# EAGLE board Versa64Cart_v1_2 (EAGLE 9.2.2)
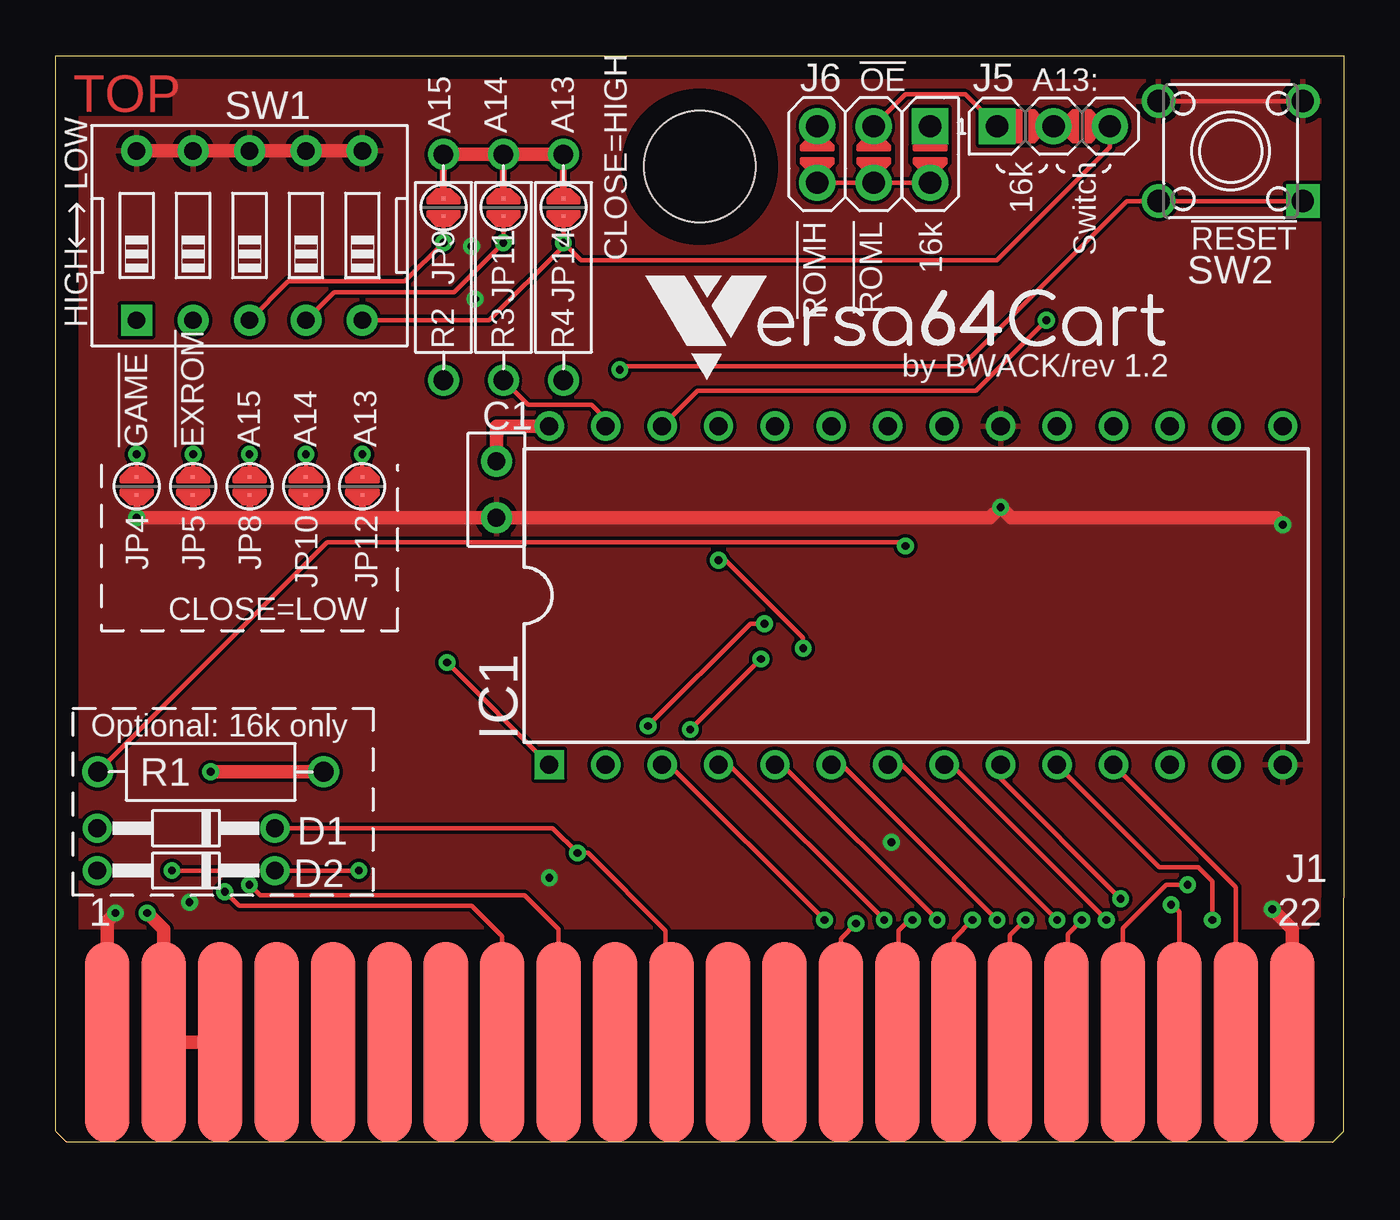
[diagram p0: board, top side]
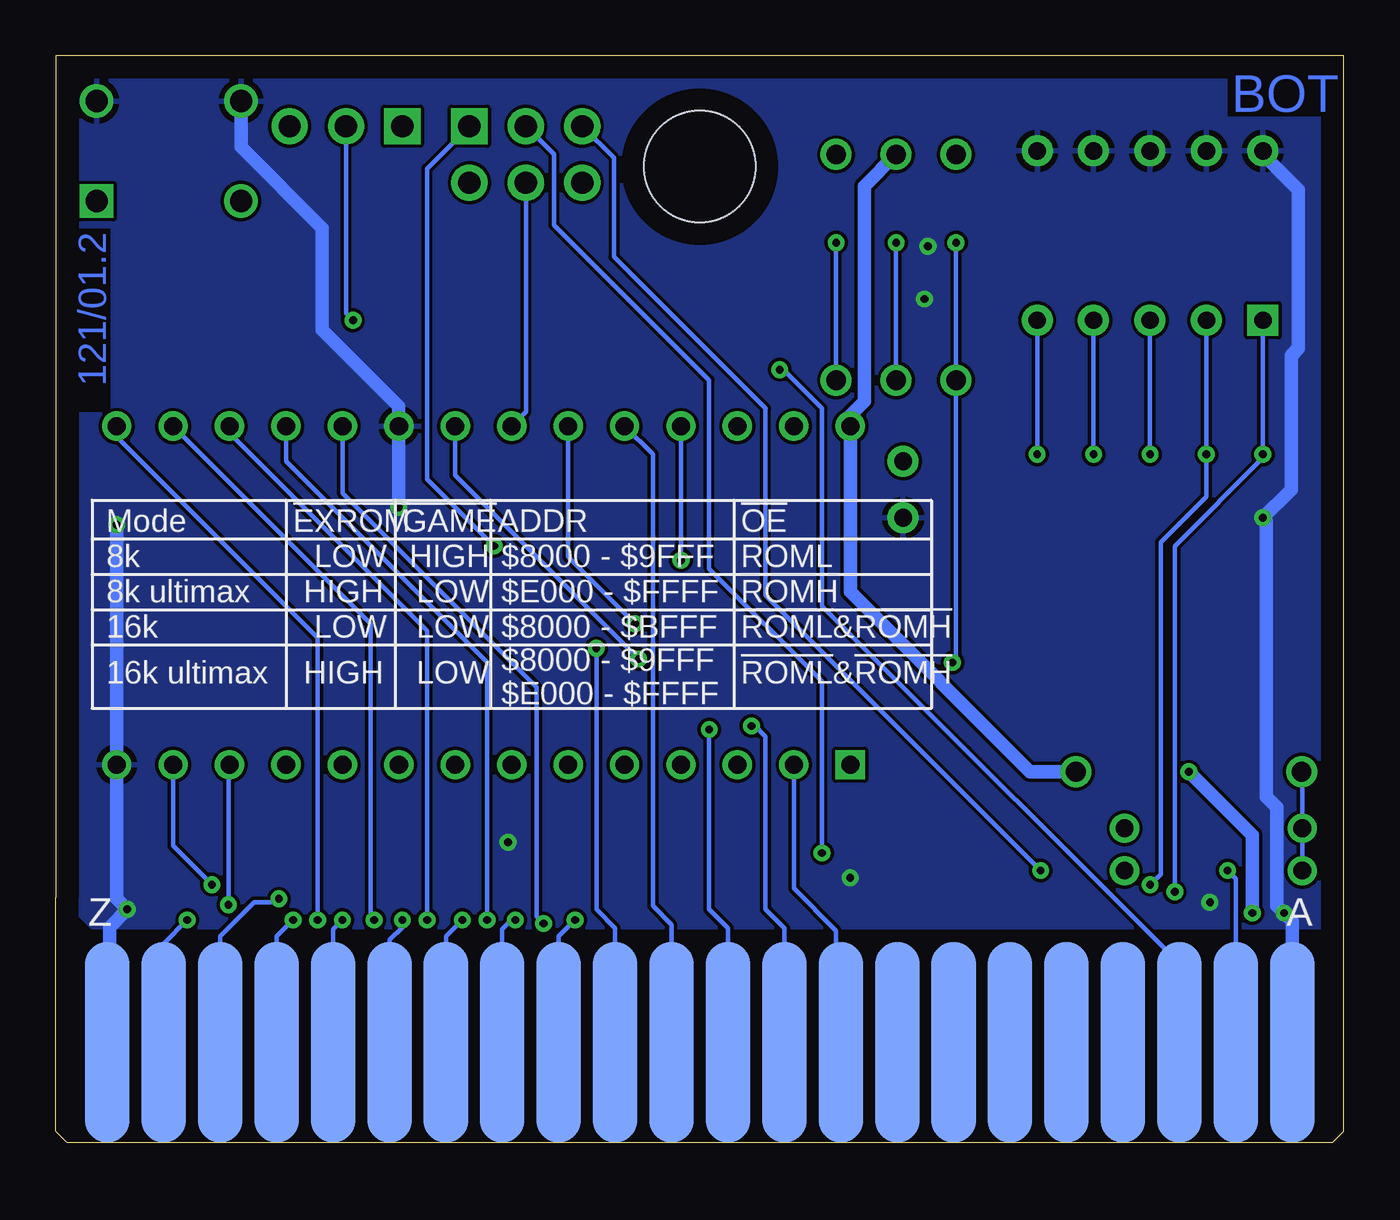
[diagram p1: board, bottom side, seen from below]

Size 58 x 48.9 mm. Coordinates in mm from the lower left corner, seen from the top.
Outline: 0,11 0,48.9 58,48.9 58,11
Copper layers (1*16): Top 0.035mm / dielectric 1.5mm / Bottom 0.035mm
Design rules "default *": minimum track width 6mil, minimum drill 0.35mm, track to track 6mil, track to pad 6mil, pad to pad 6mil, via to via 6mil, smd to smd 6mil, copper to edge 40mil, drill to drill 6mil, minimum pad ring 10mil, minimum via ring 8mil, stop-mask expansion 4mil, vias tented up to drill 24mil, thermal gap 10mil
Holes 5 mm at 29,43.9
bRestrict: 3 lines

## Footprints (pad centres in the part's own frame; a part is rotated, then mirrored left to right if it is on the bottom)
C-2,5 = drill 0.8 pad 1.397: 1 -1.27,0; 2 1.27,0
DO-35 = drill 0.8: A -4,0; K 4,0
DIL28-6 = drill 0.813 square: 1 -16.51,-7.62 | drill 0.813: 2 -13.97,-7.62; 3 -11.43,-7.62; 4 -8.89,-7.62; 5 -6.35,-7.62; 6 -3.81,-7.62; 7 -1.27,-7.62; 8 1.27,-7.62; 9 3.81,-7.62; 10 6.35,-7.62; 11 8.89,-7.62; 12 11.43,-7.62; 13 13.97,-7.62; 14 16.51,-7.62; 15 16.51,7.62; 16 13.97,7.62; 17 11.43,7.62; 18 8.89,7.62; 19 6.35,7.62; 20 3.81,7.62; 21 1.27,7.62; 22 -1.27,7.62; 23 -3.81,7.62; 24 -6.35,7.62; 25 -8.89,7.62; 26 -11.43,7.62; 27 -13.97,7.62; 28 -16.51,7.62
EXPPORT = smd 2 x 9: 1 26.67,-4.5; 2 24.13,-4.5; 3 21.59,-4.5; 4 19.05,-4.5; 5 16.51,-4.5; 6 13.97,-4.5; 7 11.43,-4.5; 8 8.89,-4.5; 9 6.35,-4.5; 10 3.81,-4.5; 11 1.27,-4.5; 12 -1.27,-4.5; 13 -3.81,-4.5; 14 -6.35,-4.5; 15 -8.89,-4.5; 16 -11.43,-4.5; 17 -13.97,-4.5; 18 -16.51,-4.5; 19 -19.05,-4.5; 20 -21.59,-4.5; 21 -24.13,-4.5; 22 -26.67,-4.5 | smd 2 x 9 bottom: A 26.67,-4.5; B 24.13,-4.5; C 21.59,-4.5; D 19.05,-4.5; E 16.51,-4.5; F 13.97,-4.5; H 11.43,-4.5; J 8.89,-4.5; K 6.35,-4.5; L 3.81,-4.5; M 1.27,-4.5; N -1.27,-4.5; P -3.81,-4.5; R -6.35,-4.5; S -8.89,-4.5; T -11.43,-4.5; U -13.97,-4.5; V -16.51,-4.5; W -19.05,-4.5; X -21.59,-4.5; Y -24.13,-4.5; Z -26.67,-4.5
COMBI-3P = drill 1 pad 1.626 square: 1 -2.54,0 | drill 1 pad 1.626: 2 0,0; 3 2.54,0
COMBI-3X2 = drill 1 pad 1.626 square: 1 -1.27,2.54 | drill 1 pad 1.626: 2 1.27,2.54; 3 -1.27,0; 4 1.27,0; 5 -1.27,-2.54; 6 1.27,-2.54
CP_OP = smd 0.152 x 0.152: 1 -0.4,0; 2 0.4,0
R-10 = drill 0.889 pad 1.397: 1 -5.08,0; 2 5.08,0
DIPSW-05V = drill 0.787 pad 1.397 square: 1 -5.08,-3.81 | drill 0.787 pad 1.397: 2 -2.54,-3.81; 3 0,-3.81; 4 2.54,-3.81; 5 5.08,-3.81; 6 5.08,3.81; 7 2.54,3.81; 8 0,3.81; 9 -2.54,3.81; 10 -5.08,3.81
JTP-1130 = drill 1 square: 1 3.25,-2.25 | drill 1: 2 -3.25,-2.25; 3 3.25,2.25; 4 -3.25,2.25

## Placement (x,y rotation side)
C1  100n  [C-2,5]  19.84,29.37 90 top
D1  1N4148  [DO-35]  5.87,14.13 0 top
D2  1N4148  [DO-35]  5.87,12.22 0 top
IC1  27C512-DIP28  [DIL28-6]  38.73,24.61 0 top
J1  C64-EXPANSION-PORT  [EXPPORT]  29,0 180 top
J5  COMBI-3P  [COMBI-3P]  44.93,45.72 0 top
J6  COMBI-3X2P  [COMBI-3X2]  36.83,44.45 270 top
JP4  [CP_OP]  3.65,29.53 90 top
JP5  [CP_OP]  6.19,29.53 90 top
JP8  [CP_OP]  8.73,29.53 90 top
JP9  [CP_OP]  17.46,42.07 90 top
JP10  [CP_OP]  11.27,29.53 90 top
JP11  [CP_OP]  20.16,42.07 90 top
JP12  [CP_OP]  13.81,29.53 90 top
JP14  [CP_OP]  22.86,42.07 90 top
R1  10k  [R-10]  6.99,16.67 0 top
R2  10k  [R-10]  17.46,39.37 90 top
R3  10k  [R-10]  20.16,39.37 90 top
R4  10k  [R-10]  22.86,39.37 90 top
SW1  DIPSW-05V  [DIPSW-05V]  8.73,40.8 0 top
SW2  JTP-1130  [JTP-1130]  52.9,44.6 0 top
U$39  [VERSA64CART]  26.51,34.29 0 top
U$40  [2LAYER]  0.79,46.35 0 top
U$41  [PCB-TITLE/]  0,60.96 0 top  (outside the outline)

## Library data of the parts
C1 R1-R4 = DISCRETE
D1 D2 = Dioden
IC1 = ST
J1 = Commodore
J5 JP4 JP5 JP8-JP12 JP14 = Cutpad
J6 = Cutpad; SPICEPREFIX: X
SW1 = DIPSWITCH
SW2 = Namae_Electronics
U$39 = Logo
U$40 = I-TEILE
U$41 = DOC_IBSP

## Nets
!EXROM: J1.9 JP5.2 SW1.2
!GAME: J1.8 JP4.2 SW1.1
!OE: IC1.22 J6.2 J6.4 J6.6
!RESET: J1.C SW2.1 SW2.2
!ROMH: D2.K J1.B J6.5
!ROML: D1.K J1.11 J5.1 J6.3
+5V: C1.2 IC1.28 J1.2 J1.3 JP9.2 JP11.2 JP14.2 R1.2 R2.2 R3.2 R4.2
A0: IC1.10 J1.Y
A1: IC1.9 J1.X
A2: IC1.8 J1.W
A3: IC1.7 J1.V
A4: IC1.6 J1.U
A5: IC1.5 J1.T
A6: IC1.4 J1.S
A7: IC1.3 J1.R
A8: IC1.25 J1.P
A9: IC1.24 J1.N
A10: IC1.21 J1.M
A11: IC1.23 J1.L
A12: IC1.2 J1.K
A13: IC1.26 J5.2
A13SW: J5.3 JP12.2 JP14.1 R4.1 SW1.5
A14: IC1.27 JP10.2 JP11.1 R3.1 SW1.4
A15: IC1.1 JP8.2 JP9.1 R2.1 SW1.3
D0: IC1.11 J1.21
D1: IC1.12 J1.20
D2: IC1.13 J1.19
D3: IC1.15 J1.18
D4: IC1.16 J1.17
D5: IC1.17 J1.16
D6: IC1.18 J1.15
D7: IC1.19 J1.14
GND: C1.1 IC1.14 IC1.20 J1.1 J1.22 J1.A J1.Z JP4.1 JP5.1 JP8.1 JP10.1 JP12.1 SW1.6 SW1.7 SW1.8 SW1.9 SW1.10 SW2.3 SW2.4
RH&RL: D1.A D2.A J6.1 R1.1

## Tracks (layer width: path | path; a pad name or v marks a point on that pad's centre or on a via)
!EXROM  (via drill 0.35)
  Top 0.203: JP5.2 v6.19,30.96 | J1.9 22.65,9.58 21.11,11.11 9.21,11.11 v8.73,11.59
  Bottom 0.203: SW1.2 v6.19,30.96 6.19,29.05 8.26,26.99 8.26,12.06 v8.73,11.59
!GAME  (via drill 0.35)
  Top 0.203: JP4.2 v3.65,30.96 | J1.8 20.11,9.26 18.73,10.64 8.26,10.64 v7.62,11.27
  Bottom 0.2: v3.65,30.96 3.65,30.8 7.62,26.83
  Bottom 0.203: v3.65,30.96 SW1.1 | v7.62,11.27 7.62,11.59 7.62,26.83
!OE
  Top 0.2: J6.6 J6.4 J6.2
  Bottom 0.2: IC1.22 36.83,32.86 J6.4
!RESET  (via drill 0.35)
  Top 0.2: v25.4,34.77 25.56,34.92 40.8,34.92 48.22,42.35 SW2.2
  Top 0.203: SW2.2 SW2.1
  Bottom 0.2: 12.54,13.18 16.99,17.62 23.5,24.13 23.5,33.02 25.24,34.77 v25.4,34.77
  Bottom 0.203: J1.C 7.41,8.04 12.54,13.18
!ROMH  (via drill 0.35)
  Top 0.2: v13.65,12.22 D2.K
  Top 0.203: v5.24,12.22 D2.K
  Bottom 0.2: v13.65,12.22 17.7,16.27 26.04,24.61 26.04,33.02 29.53,36.51 32.86,39.85 32.86,44.29 J6.5
  Bottom 0.203: J1.B 4.87,11.86 v5.24,12.22
!ROML  (via drill 0.35)
  Top 0.2: J5.1 40.96,47.15 38.26,47.15 J6.3
  Top 0.203: J1.11 27.46,4.77 27.46,9.53 23.97,13.02 v23.5,13.02 22.38,14.13 10.32,14.13 D1.K
  Bottom 0.2: v23.5,13.02 23.5,20.74 28.57,25.82 28.57,34.29 35.56,41.27 35.56,44.45 J6.3
+5V  (via drill 0.35)
  Top 0.305: JP9.2 R2.2 | JP11.2 R3.2 | JP14.2 R4.2
  Top 0.61: J1.3 J1.2 4.87,9.58 v4.13,10.32 | IC1.28 19.84,32.23 C1.2 | R4.2 R3.2 R2.2 | v6.99,16.67 R1.2
  Bottom 0.61: v4.13,10.32 4.13,13.81 v6.99,16.67 | R3.2 21.59,43.02 21.59,33.34 22.23,32.7 IC1.28 22.23,24.77 14.13,16.67 R1.2
A0  (via drill 0.35)
  Top 0.203: IC1.10 49.69,12.38 51.44,12.38 52.07,11.75 v52.07,10
  Bottom 0.203: v52.07,10 53.13,8.94 J1.Y
A1  (via drill 0.35)
  Top 0.203: IC1.9 42.55,16.35 v47.94,10.95
  Bottom 0.203: J1.X 50.59,9.26 50.01,9.84 49.05,10.79 48.26,10.79 48.1,10.95 v47.94,10.95
A2  (via drill 0.35)
  Top 0.203: IC1.8 40.32,16.99 v47.31,10
  Bottom 0.203: J1.W 48.05,9.26 v47.31,10
A3  (via drill 0.35)
  Top 0.203: IC1.7 38.1,16.99 v45.09,10
  Bottom 0.203: J1.V 45.51,9.58 v45.09,10
A4  (via drill 0.35)
  Top 0.203: v42.39,10 35.4,16.99 IC1.6
  Bottom 0.203: J1.U 42.97,9.1 42.39,9.68 v42.39,10
A5  (via drill 0.35)
  Top 0.203: v39.69,10 32.7,16.99 IC1.5
  Bottom 0.203: J1.T 40.43,9.26 v39.69,10
A6  (via drill 0.35)
  Top 0.203: IC1.4 30.32,16.99 v37.31,10
  Bottom 0.203: J1.S 37.89,9.58 37.47,10 v37.31,10
A7  (via drill 0.35)
  Top 0.203: v34.61,10 27.62,16.99 IC1.3
  Bottom 0.203: J1.R 35.35,9.26 v34.61,10
A8  (via drill 0.35)
  Top 0.203: v33.66,22.23 33.66,22.7 30.16,26.19 v29.84,26.19
  Bottom 0.203: J1.P 32.81,9.63 33.66,10.48 v33.66,22.23 | IC1.25 v29.84,26.19
A9
  Bottom 0.203: J1.N 30.27,9.79 31.11,10.64 31.11,30.96 IC1.24
A10  (via drill 0.35)
  Top 0.203: v31.75,21.75 v28.57,18.57
  Bottom 0.203: J1.M 27.73,9.63 28.57,10.48 v28.57,18.57 | v31.75,21.75 40.01,30 IC1.21
A11  (via drill 0.35)
  Top 0.203: v31.91,23.34 31.27,23.34 v26.67,18.73
  Bottom 0.203: J1.L 25.19,9.63 26.04,10.48 26.04,18.26 26.51,18.73 v26.67,18.73 | IC1.23 34.92,26.35 v31.91,23.34
A12
  Bottom 0.203: J1.K 22.86,4.71 22.86,9.53 24.77,11.43 IC1.2
A13  (via drill 0.35)
  Top 0.2: IC1.26 28.89,33.81 41.43,33.81 v44.61,36.99 | v44.61,36.99 44.77,36.99 v44.61,36.99
  Bottom 0.2: v44.61,36.99 44.93,37.31 J5.2
A13SW  (via drill 0.35)
  Top 0.2: v22.86,40.48 23.65,39.69 42.39,39.69 47.47,44.77 J5.3 | JP12.2 v13.81,30.96
  Top 0.203: JP14.1 v22.86,40.48 22.86,40.32 19.53,36.99 SW1.5
  Bottom 0.203: SW1.5 v13.81,30.96 | R4.1 v22.86,40.48
A14  (via drill 0.35)
  Top 0.2: SW1.4 12.54,38.26
  Top 0.203: JP10.2 v11.27,30.96 | JP11.1 v20.16,40.48 17.94,38.26 12.54,38.26 | R3.1 21.27,33.18 24.13,33.18 24.77,32.54 IC1.27
  Bottom 0.203: v11.27,30.96 SW1.4 | R3.1 v20.16,40.48
A15  (via drill 0.35)
  Top 0.2: IC1.1 v17.62,21.59 | SW1.3 10.48,38.73
  Top 0.203: JP8.2 v8.73,30.96 | JP9.1 v17.46,40.48 15.72,38.73 10.48,38.73
  Bottom 0.203: v8.73,30.96 SW1.3 | v17.46,40.48 R2.1 17.46,21.75 v17.62,21.59
D0
  Top 0.203: J1.21 53.13,11.48 IC1.11
D1  (via drill 0.35)
  Top 0.203: J1.20 50.59,10.37 50.27,10.69 v50.22,10.69
  Bottom 0.203: v50.22,10.69 50.22,16.94 IC1.12
D2  (via drill 0.35)
  Top 0.203: J1.19 48.05,9.63 50.01,11.59 v50.96,11.59
  Bottom 0.203: v50.96,11.59 52.7,13.34 IC1.13
D3  (via drill 0.35)
  Top 0.203: J1.18 45.56,4.55 45.56,9.37 v46.2,10
  Bottom 0.203: v46.2,10 46.2,22.7 53.98,30.48 55.24,31.75 IC1.15
D4  (via drill 0.35)
  Top 0.203: J1.17 42.97,9.31 v43.66,10
  Bottom 0.203: v43.66,10 43.66,10.16 43.81,10.32 43.81,23.34 IC1.16
D5  (via drill 0.35)
  Top 0.203: J1.16 40.43,9.16 v41.27,10
  Bottom 0.203: v41.27,10 41.27,23.02 48.74,30.48 50.16,31.91 IC1.17
D6  (via drill 0.35)
  Top 0.203: J1.15 37.94,4.55 37.94,9.53 38.5,10.08 v38.58,10
  Bottom 0.203: v38.58,10 38.58,21.59 47.62,30.64 IC1.18
D7  (via drill 0.35)
  Top 0.203: J1.14 35.35,9.16 v36.04,9.84
  Bottom 0.203: v36.04,9.84 36.35,10.16 36.35,20.48 45.09,29.21 IC1.19
GND  (via drill 0.35)
  Top 0.203: SW2.3 SW2.4
  Top 0.305: JP4.1 v3.65,28.1 | JP5.1 6.19,28.1 | JP8.1 8.73,28.1 | JP10.1 11.27,28.1 | JP12.1 13.81,28.1
  Top 0.61: J1.A 2.33,9.95 v2.7,10.32 | v54.77,10.48 55.67,9.58 J1.22 | v3.65,28.1 6.19,28.1 8.73,28.1 11.27,28.1 13.81,28.1 C1.1 42.07,28.1 v42.55,28.57 43.02,28.1 54.93,28.1 v55.24,27.78 | SW1.10 SW1.9 SW1.8 SW1.7 SW1.6
  Bottom 0.61: J1.A 2.33,9.95 v2.7,10.32 3.02,10.64 3.02,15.08 3.49,15.56 3.49,24.92 3.49,27.94 v3.65,28.1 2.38,29.37 2.38,30.64 2.38,35.4 2.06,35.72 2.06,42.86 3.65,44.45 SW1.10 | J1.22 55.56,4.61 55.56,9.68 v54.77,10.48 55.24,10.95 IC1.14 v55.24,27.78 | v42.55,28.57 IC1.20 42.55,33.12 46,36.56 46,41.13 49.65,44.79 SW2.4
  other vias: 22.23,11.91 37.62,13.49 6.03,10.79 18.89,37.94 18.73,40.32
  pour Top: 0.64,48.26 0.64,10 0.95,9.68 56.36,9.68 57.15,10.48 57.15,48.26
  pour Bottom: 0.64,48.26 0.64,10 0.95,9.68 56.36,9.68 57.15,10.48 57.15,48.26
RH&RL  (via drill 0.35)
  Top 0.2: v38.26,26.83 38.1,26.99 12.22,26.99 R1.1
  Bottom 0.2: v38.26,26.83 41.27,29.84 41.27,43.81 J6.1 | D1.A 1.87,16.64 R1.1
  Bottom 0.203: D2.A D1.A

## Text on the board
Bottom: 121/01.2
tPlace: !OE | A13: | A15 | A14 | A13 | 16k | Switch | LOW | !ROMH | !ROML | 16k | CLOSE=HIGH | !RESET | HIGH | by BWACK/rev 1.2 | !GAME | !EXROM | A15 | A14 | A13 | CLOSE=LOW | Optional: 16k only
bPlace: !OE | ADDR | !GAME | !EXROM | Mode | !ROML | $8000 - $9FFF | HIGH | LOW | 8k | !ROMH | $E000 - $FFFF | LOW | HIGH | 8k ultimax | !ROML!&!ROMH | $8000 - $BFFF | LOW | LOW | 16k | !ROML!&!ROMH | LOW | HIGH | 16k ultimax | $8000 - $9FFF / $E000 - $FFFF
Measures: 5.0
Document: 121-2-01-01.2 | BWACK | 35µm | 2 | 1.2